# EAGLE board test 2 v4 (EAGLE 9.7.0)
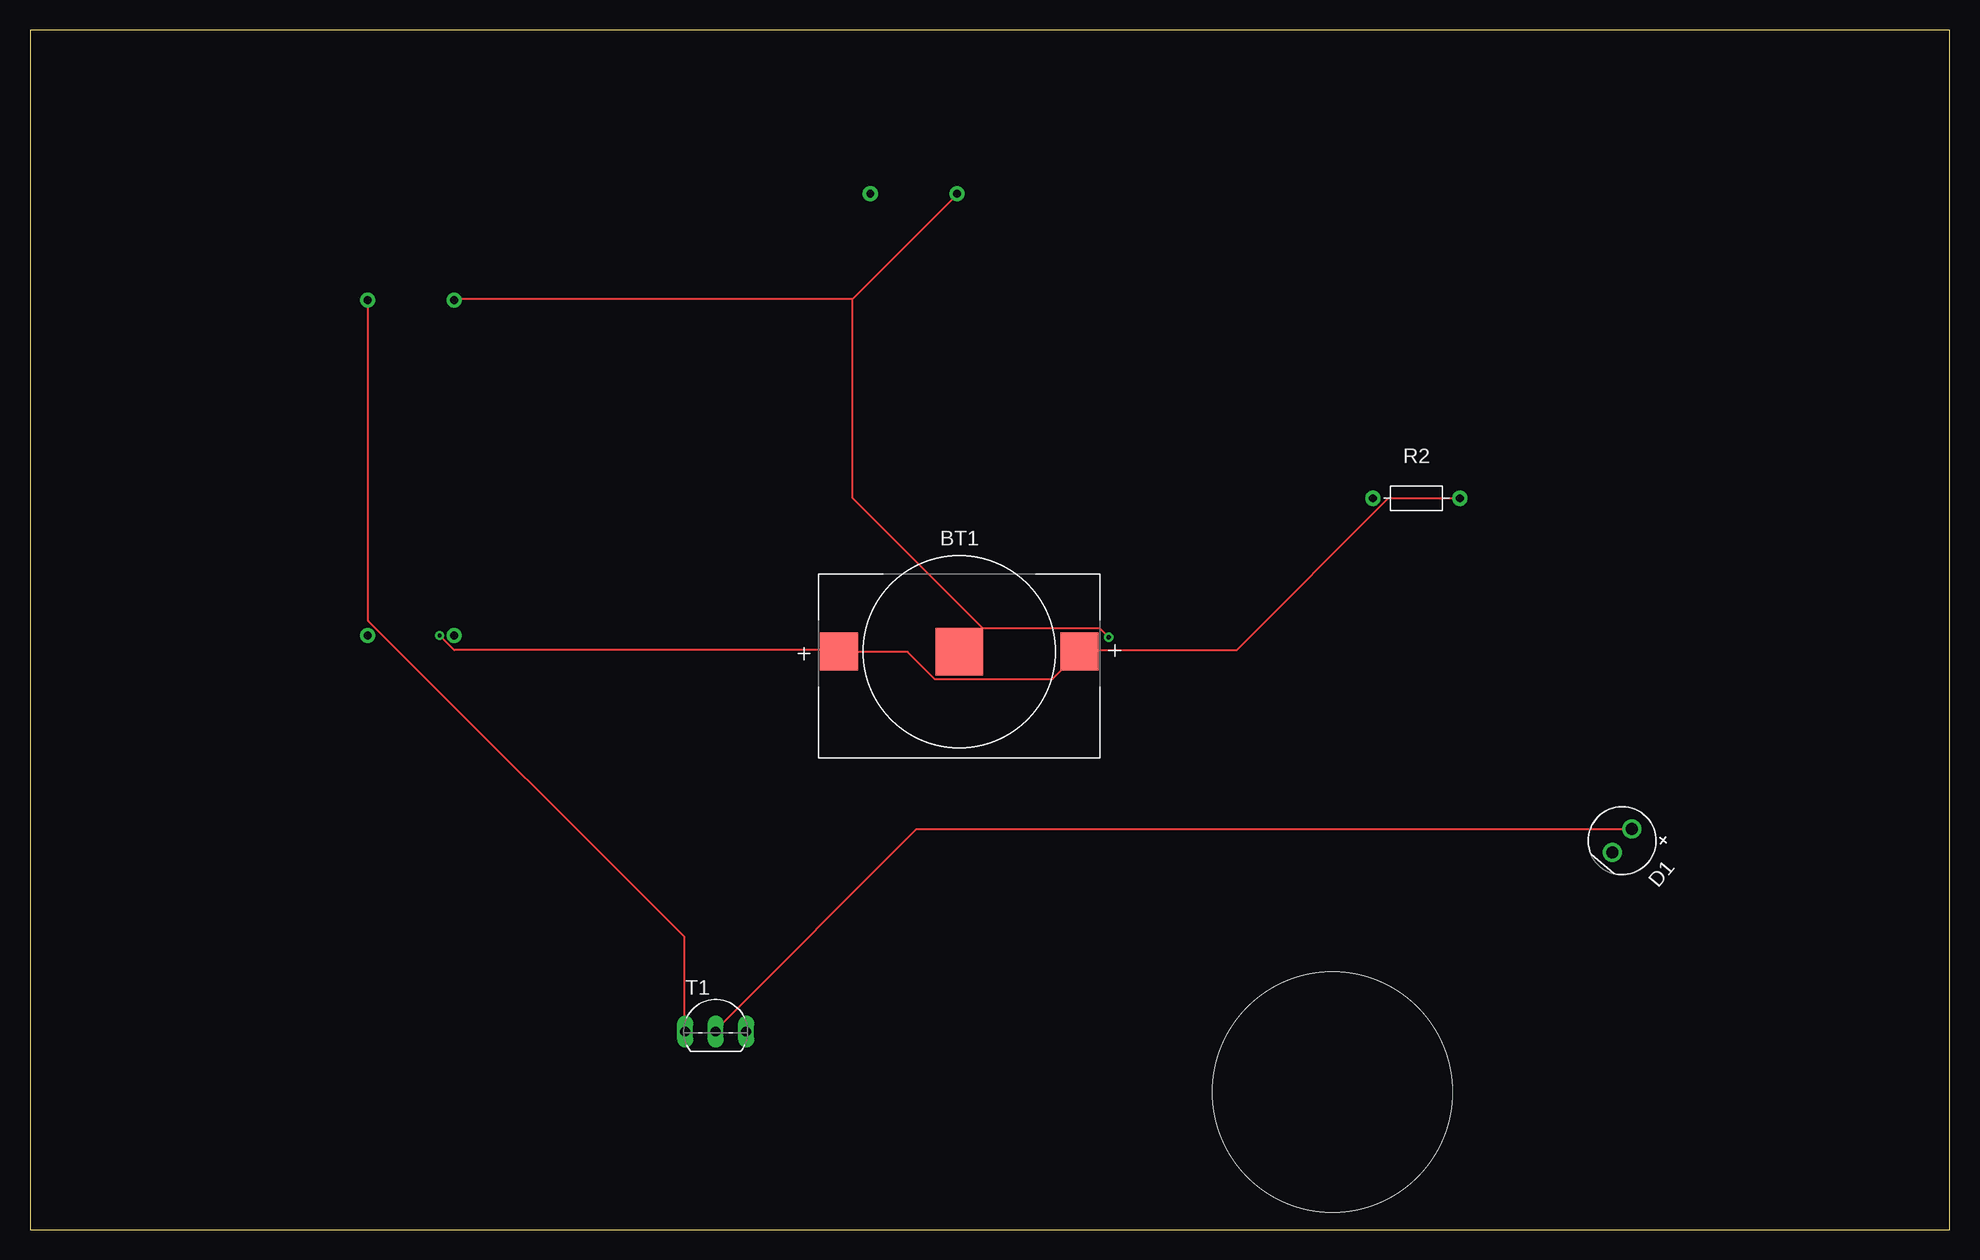
[diagram p0: board, top side]
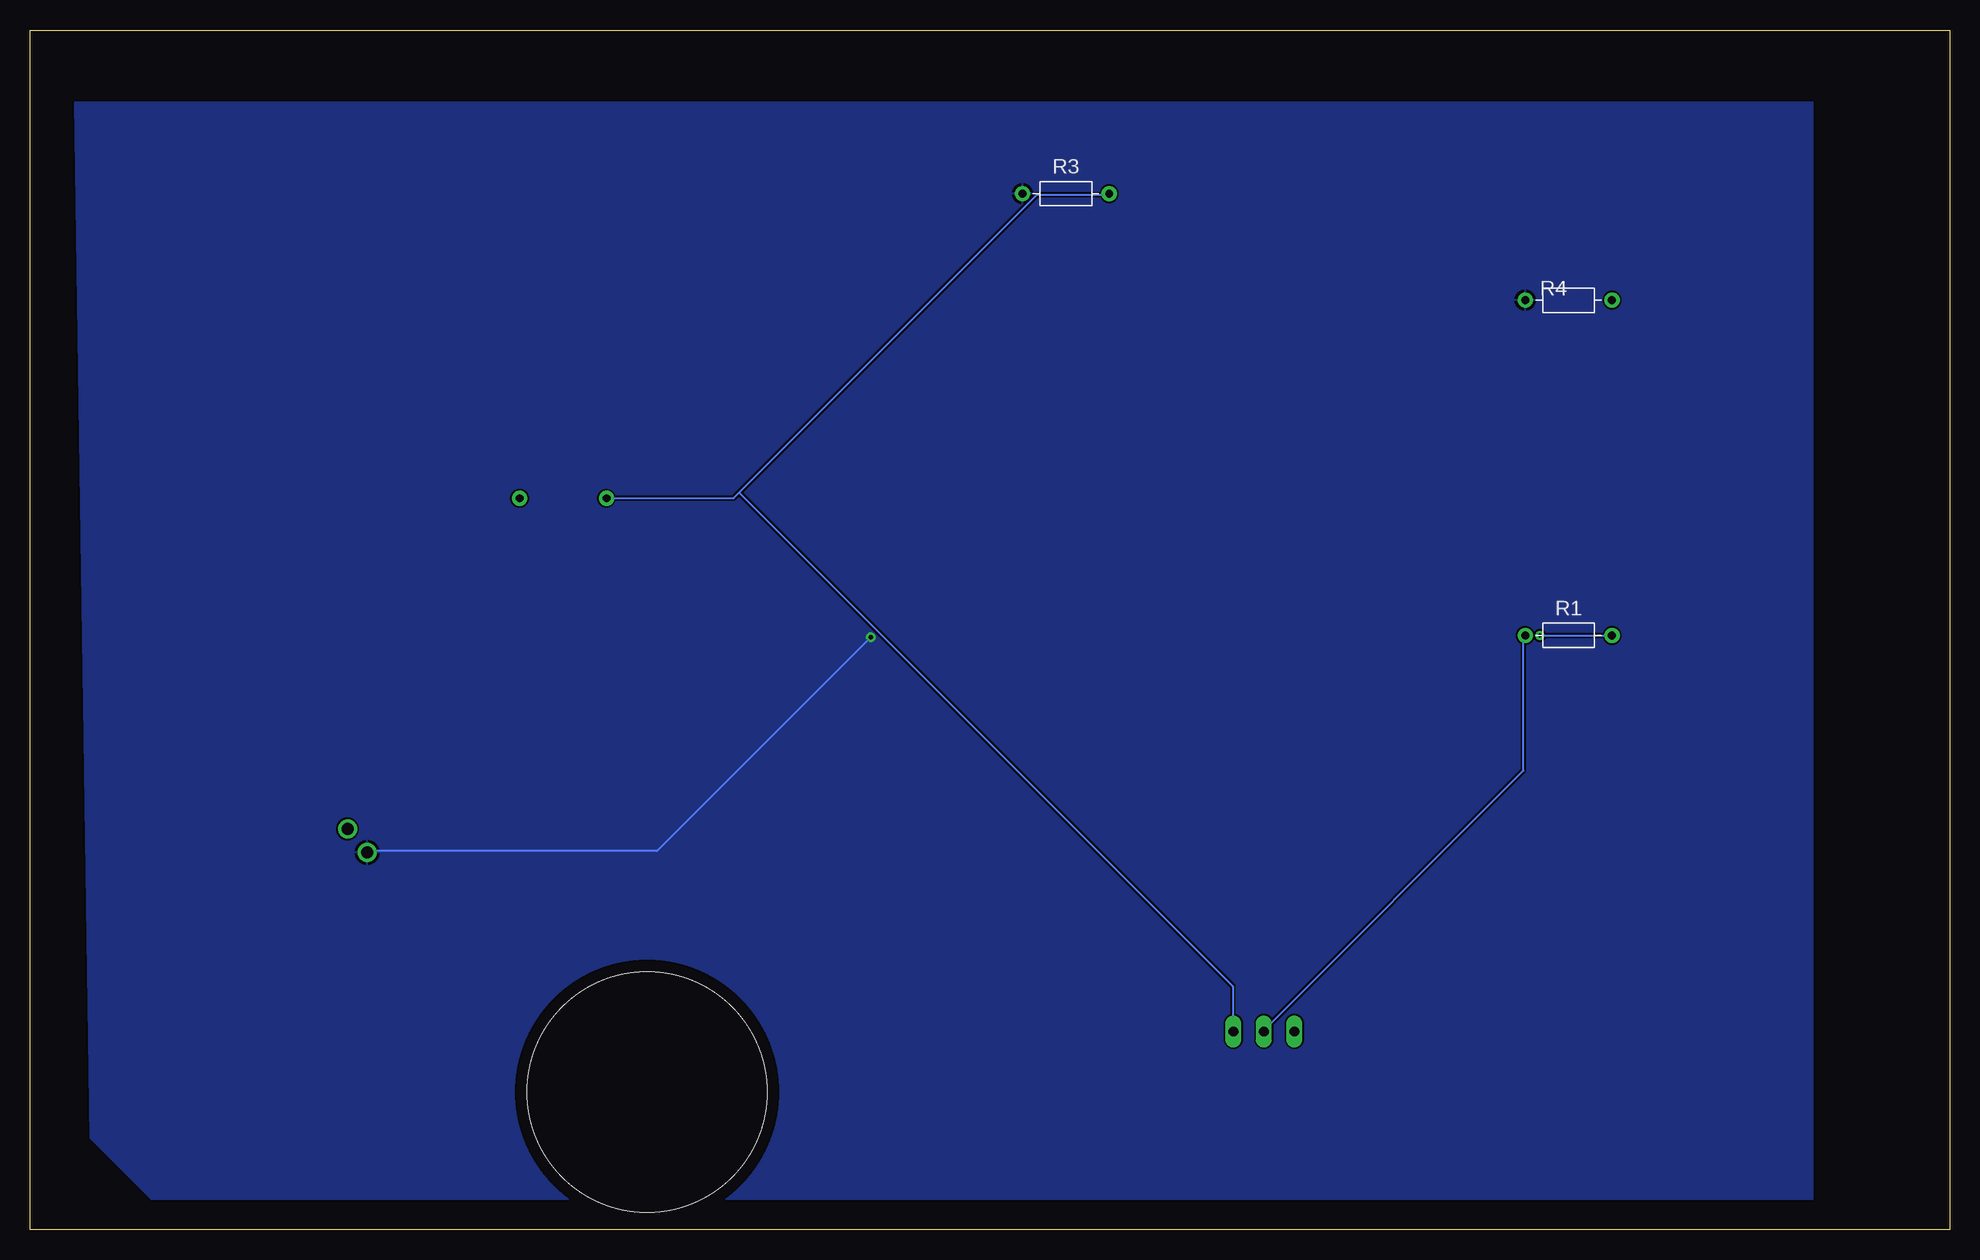
[diagram p1: board, bottom side, seen from below]

Size 160 x 100 mm. Coordinates in mm from the lower left corner, seen from the top.
Outline: 0,100 0,0 160,0 160,100 0,100
Copper layers (1*16): Top / Bottom
Stack-up Default Layer Stack: Top User Defined 0.035mm / Dielectric-1 User Defined 1.5mm / Bottom User Defined 0.035mm
Design rules: minimum copper width 6mil, minimum drill size 0.35mm, copper clearance wire_polygon to wire_polygon 6mil, copper clearance wire_polygon to pad_smd 6mil, copper clearance wire_polygon to via 6mil, copper clearance pad_smd to pad_smd 6mil, copper clearance pad_smd to via 6mil, copper clearance via to via 6mil, copper clearance smd to pad (same net) 6mil, copper clearance smd to via (same net) 6mil, copper clearance smd to smd (same net) 6mil, dimension clearance 40mil, via restrict clearance 0mil, restrict clearance 0mil, drill distance 6mil, keepout clearance 0mil
Holes 20 mm at 108.57,11.46

## Footprints (pad centres in the part's own frame; a part is rotated, then mirrored left to right if it is on the bottom)
BAT_3012 = smd 3.96 x 3.96: N 0,1.19 | smd 3.18 x 3.18: P 10.02,1.19; P1 -10.02,1.19
LEDRD254W60D565H860B_B = drill 0.981 pad 1.581: A -1.27,0; C 1.27,0
RESAD724W46L381D178B = drill 0.66 pad 1.26: 1 -3.62,0; 2 3.62,0
TO92-ECB = drill 0.813 long: B 2.54,0; C 0,0; E -2.54,0

## Placement (x,y rotation side)
BT1  DC 0 AC 10 SIN(0 10 1000 0 0)  [BAT_3012]  77.47,46.99 0 top
D1  LED-BLUE  [LEDRD254W60D565H860B_B]  132.72,32.42 230 top
R1  1000  [RESAD724W46L381D178B]  31.75,49.53 0 bottom
R2  500  [RESAD724W46L381D178B]  115.57,60.96 0 top
R3  500  [RESAD724W46L381D178B]  73.66,86.36 0 bottom
R4  10  [RESAD724W46L381D178B]  31.75,77.47 0 bottom
T1  1  [TO92-ECB]  57.15,16.51 0 top

## Library data of the parts
BT1 = Tinkercad; CATEGORY: Battery-Holder; CELL_DIAMETER: 16mm; DESCRIPTION: Battery Retainer Coin, 16.0mm 1 Cell SMD (SMT) Tab; MANUFACTURER: Keystone Electronics; MPN: 3012; PART_STATUS: ACTIVE; ROHS_COMPLIANT: COMPLIANT; SERIES: -; SPICEPREFIX: V; SUB-CATEGORY: Holder; TYPE: Coin Cell
D1 = Opto-Electronic; SPICEMODEL: DMOD; SPICEMODELTEXT: ********************** \n* Autodesk EAGLE - Spice Model File \n* Date: 9/17/17 \n* basic diode intrinsic model \n********************** \n.MODEL DMOD D; SPICEPREFIX: D
R1-R3 = Resistor; CATEGORY: Resistor; SPICEPREFIX: R; SUB-CATEGORY: Fixed
R4 = Resistor; CATEGORY: Resistor; SUB-CATEGORY: Fixed
T1 = transistor-neu-to92; SPICEMODEL: QNPN; SPICEMODELTEXT: ********************** \n* Autodesk EAGLE - Spice Model File \n* Date: 9/17/17 \n* basic npn intrinsic model \n********************** \n.MODEL QNPN NPN; SPICEPREFIX: Q

## Nets
GND: BT1.N D1.C R3.1 R4.1
N$1: BT1.P BT1.P1 R1.2 R2.2
N$2: R2.1 R3.2 T1.B
N$4: R4.2 T1.E
N$5: D1.A R1.1 T1.C

## Tracks (layer width: path | path; a pad name or v marks a point on that pad's centre or on a via)
GND  (via drill 0.35)
  Top 0.152: 68.58,77.57 35.51,77.57 R4.1 | 68.58,77.57 77.27,86.26 R3.1 | v89.92,49.38 89.15,50.14 79.4,50.14 | 79.4,50.14 77.57,48.31 BT1.N 79.4,50.14 | 68.58,77.57 68.58,60.96 79.4,50.14
  Bottom 0.152: v89.92,49.38 107.75,31.55 131.83,31.55 D1.C
  pour Bottom: 156.21,93.98 11.43,93.98 11.43,2.54 149.86,2.54 154.94,7.62
N$1  (via drill 0.35)
  Top 0.152: v34.14,49.53 35.36,48.31 67.36,48.31 BT1.P1 67.51,48.16 73.15,48.16 75.44,45.87 85.19,45.87 87.48,48.16 BT1.P 87.63,48.31 100.58,48.31 113.23,60.96 119.18,60.96 R2.2
  Bottom 0.152: v34.14,49.53 28.19,49.53 R1.2
N$2
  Bottom 0.152: 100.89,61.42 101.35,60.96 111.86,60.96 R2.1 | 100.89,61.42 76.05,86.26 70.1,86.26 R3.2 | 100.89,61.42 59.74,20.27 59.74,16.61 T1.B
N$4
  Top 0.152: R4.2 28.19,77.42 28.19,50.75 54.56,24.38 54.56,16.61 T1.E
N$5
  Top 0.152: D1.A 133.5,33.38 73.91,33.38 57.15,16.61 T1.C
  Bottom 0.152: R1.1 35.51,49.53 35.51,38.25 57.15,16.61 T1.C
(copper drawn outside any net)
  shapes: Bottom area x1